# Altium PCB PCB1.PcbDoc
Units mil, origin at the board's own origin, x right, y up, seen from the top; angles counter-clockwise.
Board outline 380 x 1035 mil, 2 copper layers (Top Layer, Bottom Layer); 5 components, 3 nets, 14 pads, 12 vias.
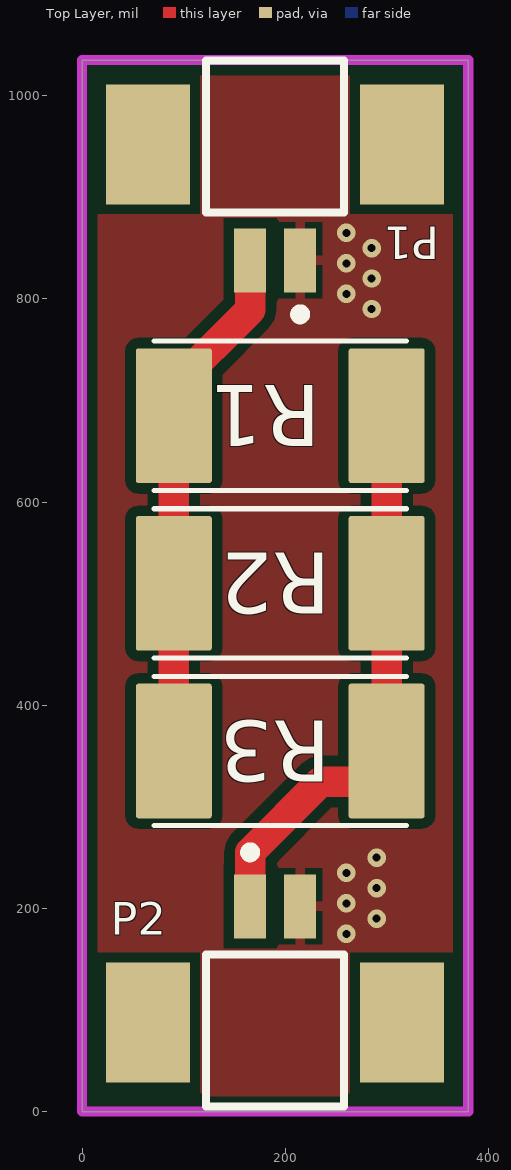
[diagram p0: Top Layer view]
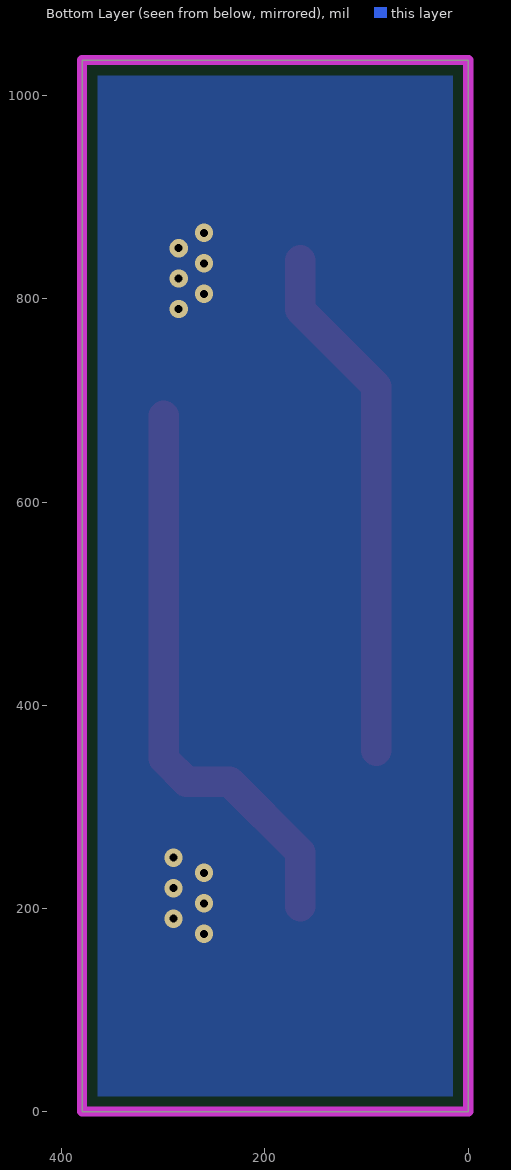
[diagram p1: Bottom Layer view, seen from below]
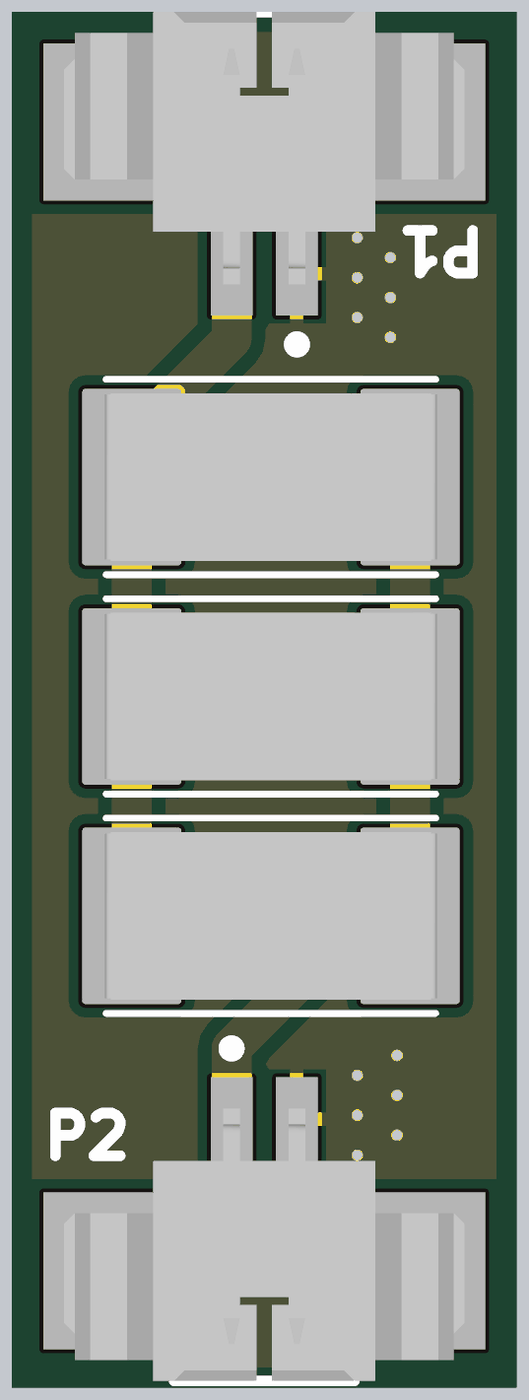
[diagram p2: 3D render of the assembled board from above, using the file's embedded part models]

## Layer stack, top to bottom
Top Solder: solder mask 0.4, Solder Resist, Dk 3.5
Top Layer: signal copper 1.4
Dielectric 1: dielectric 12.6, FR-4, Dk 4.8
Bottom Layer: signal copper 1.4
Bottom Solder: solder mask 0.4, Solder Resist, Dk 3.5

## Board outline
0,0 0,1035 380,1035 380,0

## Design rules (kind name [scope] priority, off if disabled: settings)
BoardOutlineClearance [All] p1: gap=7.87 ignorepadtopadclearanceinfootprint=FALSE except(10: Poly-OutlineEdge)
Clearance [All] p1: gap=10 ignorepadtopadclearanceinfootprint=FALSE except(5: Arc-SMDPad Arc-Text Track-SMDPad Track-Text SMDPad-SMDPad SMDPad-Text THPad-Text Via-Text Fill-Text Poly-Text Region-Text Text-Text; 6: Arc-Arc Arc-Track Track-Track; 7.87: Arc-THPad Track-THPad SMDPad-THPad; 9.84: Arc-Hole Track-Hole SMDPad-Hole THPad-Hole Via-Hole Fill-Hole Poly-Hole Region-Hole Text-Hole; 19.68: THPad-THPad)
ComponentClearance [All] p1: gap=4 collisioncheckmode=3 verticalgap=4 showdistances=TRUE
DiffPairsRouting [All] p1: maxlimit=5 minlimit=5 mostfreqgap=5 toplayer_minwidth=5.46 toplayer_maxwidth=5.46 toplayer_prefwidth=5.46 bottomlayer_minwidth=5.46 bottomlayer_maxwidth=5.46 bottomlayer_prefwidth=5.46 maxuncoupledlength=500
Height [All] p1: minheight=0 maxheight=71497.94 prefheight=500
HoleSize [All] p1: absolutevalues=TRUE maxlimit=248.03 minlimit=7.87 maxpercent=80.000 minpercent=20.000
HoleToHoleClearance [All] p1: gap=9.84 allowstackedmicrovias=FALSE
MinimumAnnularRing [All] p1: minimumring=5.12
MinimumSolderMaskSliver [All] p1: minsoldermaskwidth=0
PlaneClearance [All] p1: clearance=10
PlaneConnect PlaneConnectPowerPads [InPadClass('PowerPads')] p1: planeconnectstyle=Direct reliefexpansion=20 reliefentries=4 reliefconductorwidth=10 reliefairgap=10
PlaneConnect [All] p2: pad.planeconnectstyle=Relief pad.reliefexpansion=11.81 pad.reliefentries=4 pad.reliefconductorwidth=10 pad.reliefairgap=6 via.planeconnectstyle=Direct via.reliefexpansion=11.81 via.reliefentries=4 via.reliefconductorwidth=5 via.reliefairgap=5
PolygonConnect PolygonConnectPowerPads [All vs (InPadClass('PowerPads'))] p1: connectstyle=Direct reliefconductorwidth=10 reliefentries=4 polygonreliefangle="90 Angle" airgapwidth=10
PolygonConnect [All] p2: thpad.connectstyle=Relief thpad.reliefconductorwidth=10 thpad.reliefentries=4 thpad.polygonreliefangle="90 Angle" thpad.airgapwidth=6 smdpad.connectstyle=Relief smdpad.reliefconductorwidth=10 smdpad.reliefentries=4 smdpad.polygonreliefangle="90 Angle" smdpad.airgapwidth=6 via.connectstyle=Direct via.reliefconductorwidth=5 via.reliefentries=4 via.polygonreliefangle="90 Angle" via.airgapwidth=5
RoutingVias [All] p1: holewidth=7.87 width=18.11 viastyle="Through Hole" minholewidth=7.87 minwidth=18.11 maxholewidth=248.03 maxwidth=257.87
SilkToSilkClearance [All] p1: silktosilkclearance=0
SilkToSolderMaskClearance [IsPad] p1: minsilkscreentomaskgap=4 clearancetoexposedcopper=TRUE
SolderMaskExpansion Vias [IsVia] p1: expansion=2.95 istentingtop=TRUE
SolderMaskExpansion [All] p2: expansion=2.95 istentingtop=FALSE
Width Power [(InNet('1V2') OR InNet('2V5') OR InNet('3V3') OR InNet('5V') OR InNet('VPLL') OR InNet('USB_VBUS') OR InNet('1V2') OR InNet('A_3V3') OR InNet('LED_B') OR InNet('LED_R')OR InNet('LED_G') or InNet('NetJ2_1'))] p1: maxlimit=25 minlimit=5 preferedwidth=10 minimp=50.000000 maximp=50.000000 favimp=50.000000
Width [All] p2: maxlimit=393.7 minlimit=5 preferedwidth=6.49 minimp=50.000000 maximp=50.000000 favimp=50.000000
20 further rules are at their usual default settings.

## Classes and differential pairs
component class Sheet1: P1 P2

## Components (designator, comment, footprint, x,y, rotation, side; value= is the part's Value field where it differs from the comment)
P1 "53261-0271" MOLX-53261-0271_V 190,895 r180 top
P2 "53261-0271" MOLX-53261-0271_V 190,145 r0 top
R1 "352210RFT" RESC6331X70N 195,685 r180 top
R2 "352210RFT" RESC6331X70N 195,520 r180 top
R3 "352210RFT" RESC6331X70N 195,355 r180 top

## Footprints (in the part's own frame and the unit in brackets; to place one, negate y for a bottom-side part, rotate by r counter-clockwise, add the part's x,y. Pads: shape width x height; smd on the part's side, far side on the other; paste and mask are expansions set on the pad)
MOLX-53261-0271_V [mm] "Header, 2-Leads, Pitch 1.25mm"
  rect 0.8x1.6 smd: 1(-0.625,1.45) 2(0.625,1.45)
  rect 2.1x3 smd: MP1(-3.175,-1.45) MP2(3.175,-1.45)
  silkscreen extent -1.72,-3.55 1.73,2.92, body extent -3.82,-3.55 3.83,1.65, height 3.41
RESC6331X70N [mm]
  rrect7% 1.9x3.37 smd: 1(-2.66,0) 2(2.66,0)
  silkscreen extent -3.15,-1.87 3.15,1.87, body extent -3.18,-1.6 3.18,1.6, height 1.13

## Part data
P1 P2: library part CMP-042-000002-1, "1.25mm Pitch PicoBlade™ Header, Surface Mount, Right Angle, Lead-Free, 2 Circuits"
R1 R2 R3: library part CMP-146-000000-4, "Res Thick Film 2512 10 Ohm 1% 3W ±100ppm/C Pad SMD T/R", Package=None, Availability=Unavailable, Component Type=Standard, Design Item ID=352210RFT, MP=352210RFT, Pin Count=2, Price=None, Source=2176231-1.SchLib

## Via types
v1: diameter 18.11, hole 7.87, Top Layer to Bottom Layer, tented both sides, 12 vias

## Nets (pads, with @x,y where several pads share a name; then routed paths per layer and width w, separated by ;. In a path a pad name is that pad's centre, name@x,y a point inside that pad or via, vN(x,y) a via of type N, cw(c..) or ccw(c..) an arc to the next point about the centre after c; other vN are vias at no path point)
GND: P1.1 P2.2
  other v1: 260,175 290,190 260,205 290,220 260,235 290,250 285,790 260,805 285,820 260,835 285,850 260,865
NetP1_2: P1.2 R1.2 R2.2 R3.2 | length 514
  Top Layer w30: R3.2 R2.2 R1.2 90.28,713.94 165.39,789.06 P1.2
NetP2_1: P2.1 R1.1 R2.1 R3.1 | length 563.4
  Top Layer w30: P2.1 165.39,255.39 234.9,324.9 277.32,324.9 299.72,347.3 R2.1 R1.1
pads on no net: P1.MP1 P1.MP2 P2.MP1 P2.MP2

## Polygon pours and split planes (outlines as drawn)
GND on Bottom Layer "NONET_L-01_P-001" (solid, remove dead copper, pour order 1): 0,0 0,1035 380,1035 380,0
GND on Top Layer "NONET_L-01_P-001" (solid, remove dead copper, pour order 0): 0,0 5,5 5,1035 380,1035 380,0

## Keep-outs
Keep-Out Layer:
  the board outline again, w10

## Silkscreen, mask and mechanical layers (free items; w line width, h text height)
Mechanical 1:
  the board outline again, w10